# Altium PCB PCB1.PcbDoc
Units mil, origin at the board's own origin, x right, y up, seen from the top; angles counter-clockwise.
Board outline 250 x 365 mil, 4 copper layers (Top Layer, Signal Layer 1, Signal Layer 2, Bottom Layer), stack 30.635 mil thick; 2 components, 9 nets, 34 pads, 16 vias.
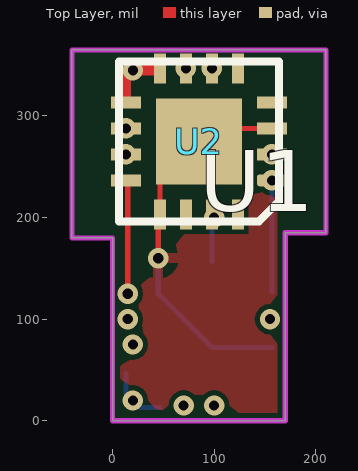
[diagram p0: Top Layer view]
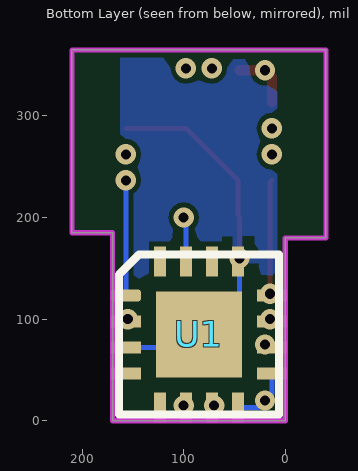
[diagram p1: Bottom Layer view, seen from below]
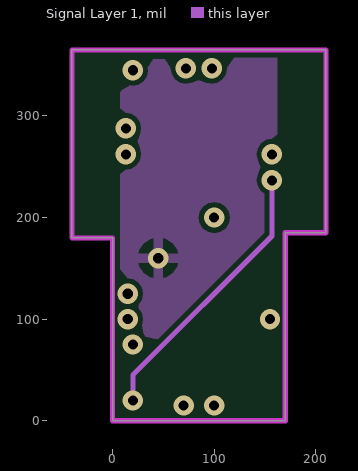
[diagram p2: Signal Layer 1]
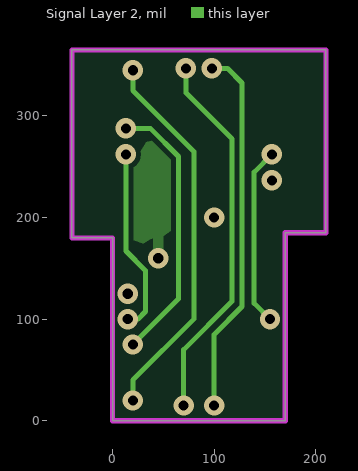
[diagram p3: Signal Layer 2]

## Layer stack, top to bottom
Top Solder: solder mask 0.4, Solder Resist, Dk 3.5
Top Layer: signal copper 1.4
Dielectric 1: core 10, FR-4, Dk 4.2
Signal Layer 1: signal copper 1.4173
Dielectric 3: prepreg 5, Dk 4.2
Signal Layer 2: signal copper 1.4173
Dielectric 2: core 10, Dk 4.2
Bottom Layer: signal copper 1.4
Bottom Solder: solder mask 0.4, Solder Resist, Dk 3.5

## Board outline
0,0 170,0 170,185 210,185 210,365 -40,365 -40,180 0,180

## Design rules (kind name [scope] priority, off if disabled: settings)
Clearance [All] p1: gap=5
PolygonConnect [All] p1: connectstyle=Relief reliefconductorwidth=10 reliefentries=4 polygonreliefangle="90 Angle" airgapwidth=10
RoutingVias [All] p1: holewidth=15 width=20 viastyle="Through Hole" minholewidth=10 minwidth=18 maxholewidth=30 maxwidth=50
SolderMaskExpansion [All] p1: expansion=4
Width [All] p1: maxlimit=100 minlimit=5 preferedwidth=5
30 further rules are at their usual default settings.

## Components (designator, comment, footprint, x,y, rotation, side; value= is the part's Value field where it differs from the comment)
U1 "FT230XQ-R" QFN-16 85,85 r90 bottom
U2 "FT230XQ-R" QFN-16 85,275 r270 top

## Footprints (in the part's own frame and the unit in brackets; to place one, negate y for a bottom-side part, rotate by r counter-clockwise, add the part's x,y. Pads: shape width x height; smd on the part's side, far side on the other; paste and mask are expansions set on the pad)
QFN-16 [mm]
  rrect50% 0.3x0.75 smd: 1(0.975,1.825)
  rect 0.3x0.75 smd: 2(0.325,1.825) 3(-0.325,1.825) 4(-0.975,1.825) 9(-0.975,-1.825) 10(-0.325,-1.825) 11(0.325,-1.825) 12(0.975,-1.825)
  rect 0.75x0.3 smd: 5(-1.825,0.975) 6(-1.825,0.325) 7(-1.825,-0.325) 8(-1.825,-0.975) 13(1.825,-0.975) 14(1.825,-0.325) 15(1.825,0.325) 16(1.825,0.975)
  rect 2.15x2.15 smd: 17(0,0)
  silkscreen extent -2,-2 2,2, body extent -2,-2 2,2, height 0.92

## Part data
U1 U2: "USB to Basic UART Interface Chip, UHCI/OHCI/EHCI Compatible, USB 2.0 Compatible, -40 to +85 degC, 16-Pin QFN, Pb-Free, Tape and Reel"

## Via types
v1: diameter 20, hole 10, Top Layer to Bottom Layer, 16 vias

## Nets (pads, with @x,y where several pads share a name; then routed paths per layer and width w, separated by ;. In a path a pad name is that pad's centre, name@x,y a point inside that pad or via, vN(x,y) a via of type N, cw(c..) or ccw(c..) an arc to the next point about the centre after c; other vN are vias at no path point)
NetU1_1: U1.1 U1.8 U1.9 U2.1 U2.8 U2.9 | length 876.1
  Top Layer w10: U2.9 13.15,338.15 v1(20,345) U2.8@45,345
  Signal Layer 1 w5: v1(20,20) 20,45 156.85,181.85 v1(156.85,236.61)
  Signal Layer 2 w5: v1(20,20) 20,40 80,100 80,265 20,325 v1(20,345)
  Bottom Layer w5: U1.9 13.15,26.85 v1(20,20) 26.85,13.15 U1.8 ; U1.1@156.85,126.85 v1(156.85,236.61)
NetU1_2: U1.2 U2.2 | length 175.9
  Signal Layer 2 w5: v1(155,100) 139.35,115.65 139.35,244.7 v1(156.85,262.2)
NetU1_3: U1.3 U1.13 U1.17 U2.3 U2.13 U2.17 | length 373.6
  Top Layer w5: v1(45,160) U2.13@45,200 ; U2.13 46.61,236.61 U2.17 97.8,287.8 U2.3
  Bottom Layer w5: v1(45,160) 45,125 U1.17 97.8,72.2 U1.3
NetU1_6: U1.6 U2.6 | length 364.5
  Signal Layer 2 w5: v1(97.8,346.85) 113.15,346.85 127.5,332.5 127.5,112.5 100,85 v1(100,15)
NetU1_7: U1.7 U2.7 | length 370.3
  Signal Layer 2 w5: v1(70,15) 70,70 117.5,117.5 117.5,277.5 72.2,322.8 v1(72.2,346.85)
NetU1_10: U1.10 U2.10 | length 267
  Signal Layer 2 w5: v1(13.15,287.8) 37.2,287.8 65,260 65,120 v1(20,75)
NetU1_11: U1.11 U2.11 | length 183.3
  Signal Layer 2 w5: v1(13.15,262.2) 13.15,167.1 32.5,147.75 32.5,107.5 25,100 v1(15,100)
NetU1_12: U1.12 U2.12 | length 112.4
  Top Layer w5: U2.12 15,234.76 v1(15,125)
NetU1_15: U1.15 U2.15 | length 44.1
  Bottom Layer w5: U1.15 97.8,197.8 v1(100,200)
pads on no net: U1.4 U1.5 U1.14 U1.16 U2.4 U2.5 U2.14 U2.16

## Polygon pours and split planes (outlines as drawn)
NetU1_3 on Top Layer "GND Plane" (solid, remove dead copper, pour order 0): 5,5 165,5 165,360 5,360 5,5
NetU1_3 on Signal Layer 1 "GND Plane" (solid, remove dead copper, pour order 2): 5,5 165,5 165,360 5,360 5,5
NetU1_3 on Signal Layer 2 "GND Plane" (solid, remove dead copper, pour order 4): 5,5 165,5 165,360 5,360 5,5
NetU1_3 on Bottom Layer "GND Plane" (solid, remove dead copper, pour order 6): 5,5 165,5 165,360 5,360 5,5

## Keep-outs
Keep-Out Layer:
  the board outline again, w5